# Altium PCB Place_3D_Body.PcbDoc
Units mil, origin at the board's own origin, x right, y up, seen from the top; angles counter-clockwise.
Board outline 1684 x 946 mil, 2 copper layers (Top Layer, Bottom Layer); 20 components, 10 nets, 51 pads, 29 vias.
Unrouted connection lines stored in the file: 1.
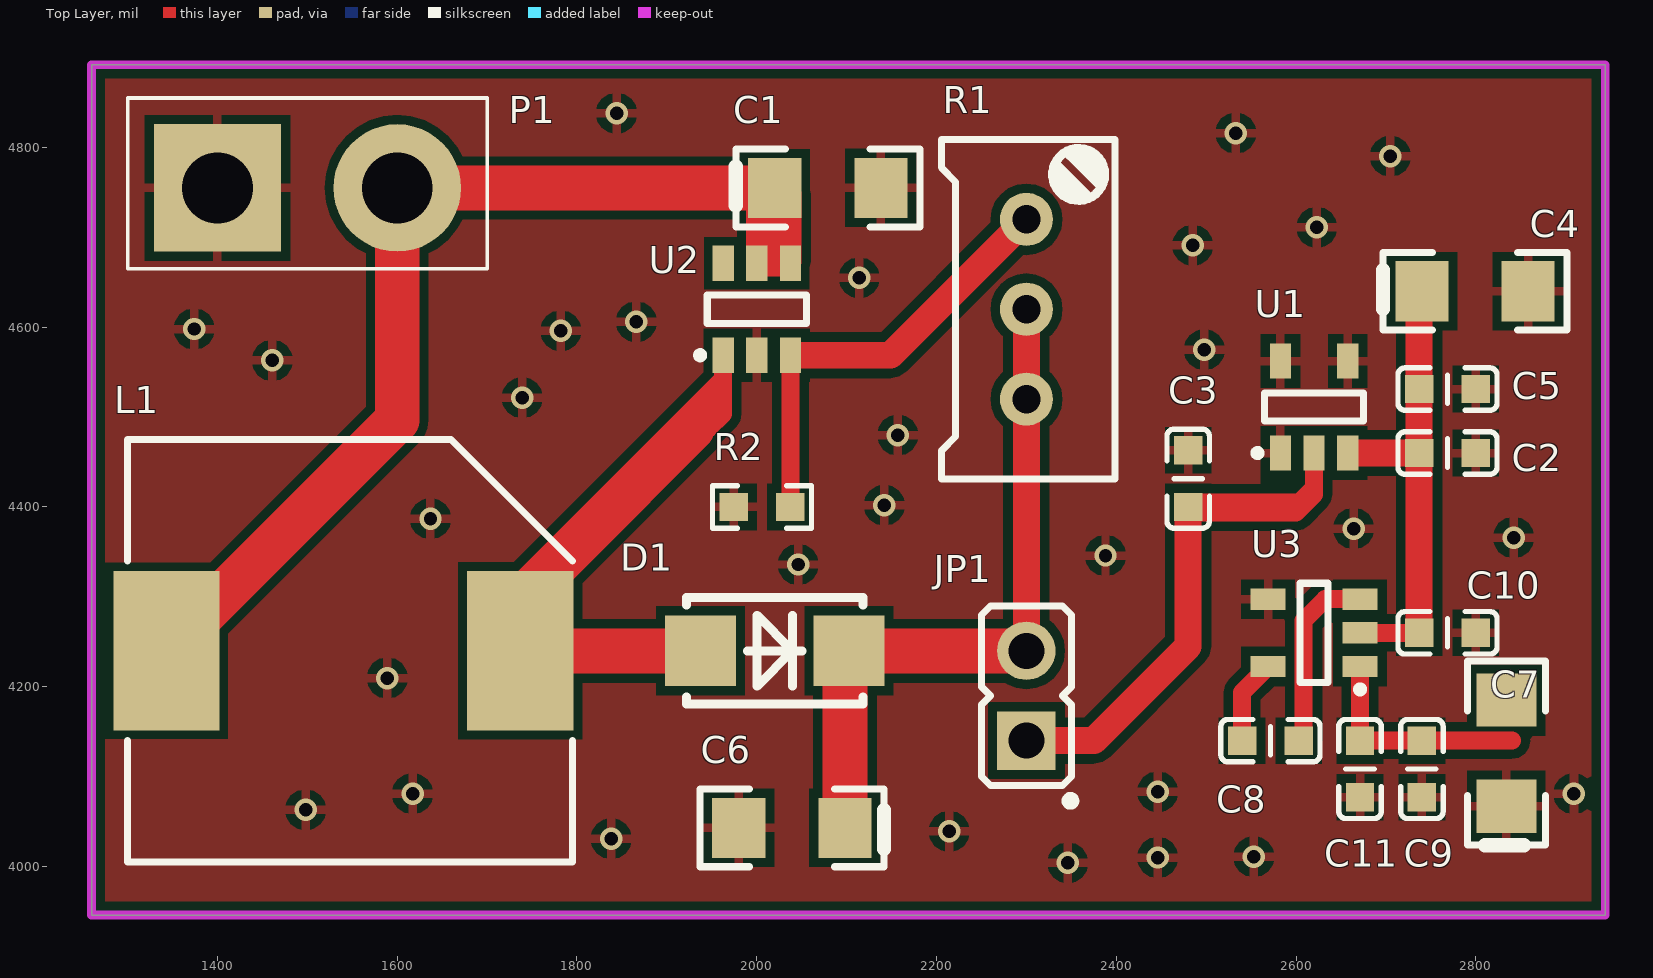
[diagram p0: Top Layer view]
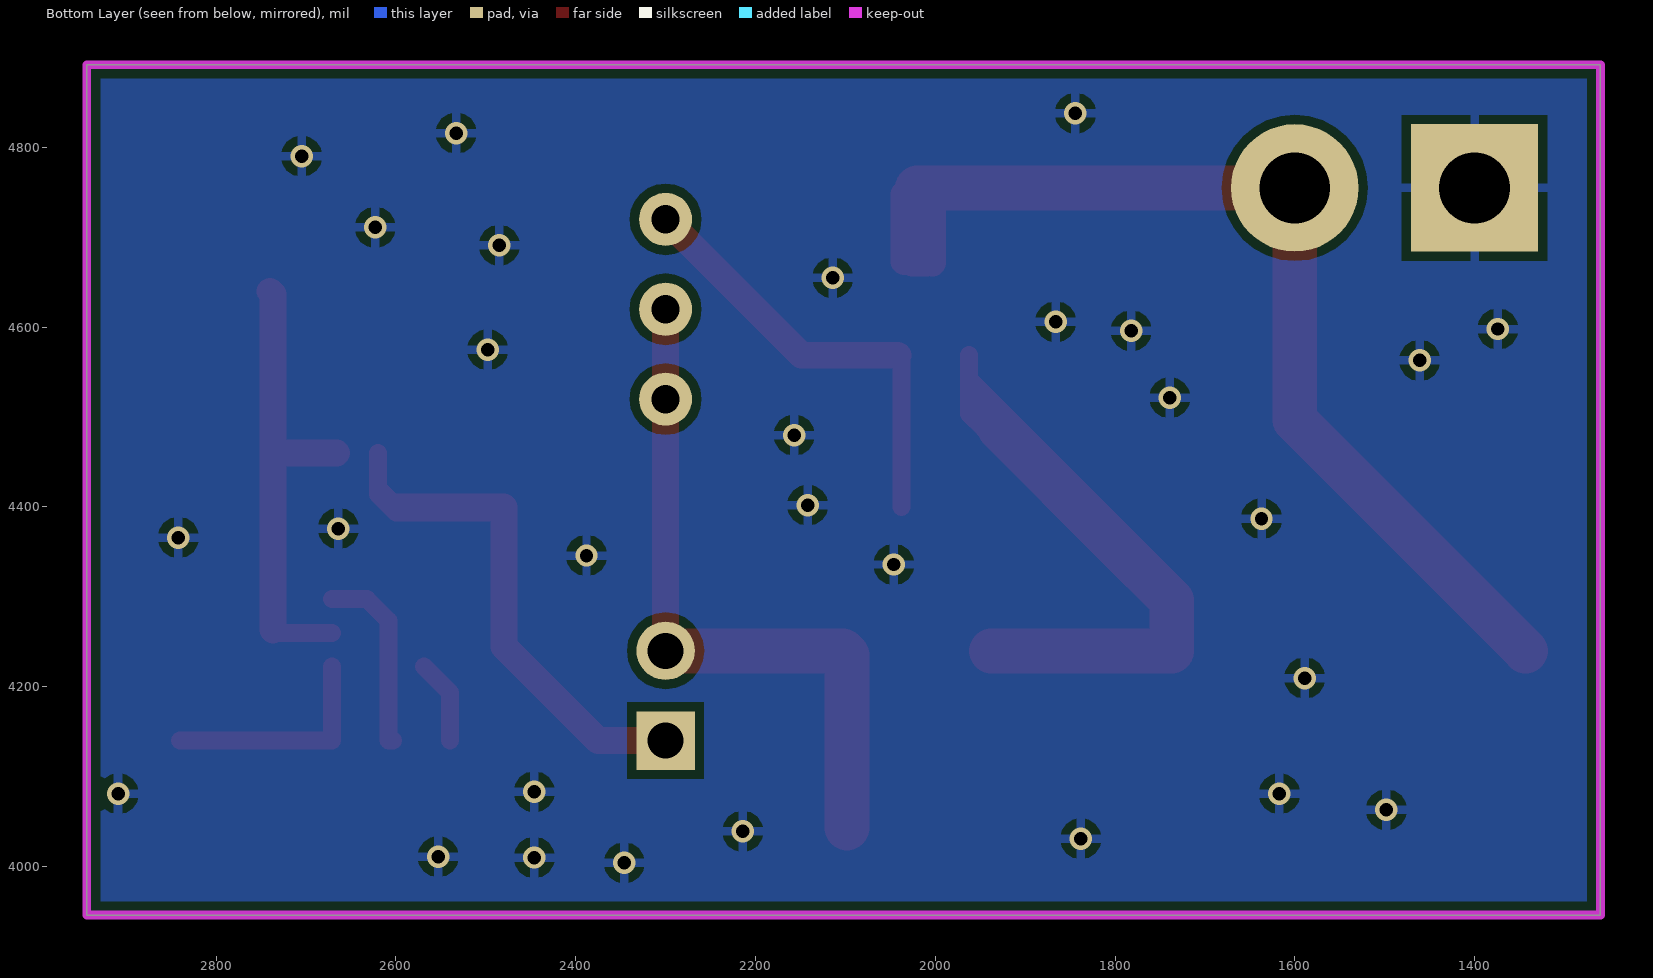
[diagram p1: Bottom Layer view, seen from below]
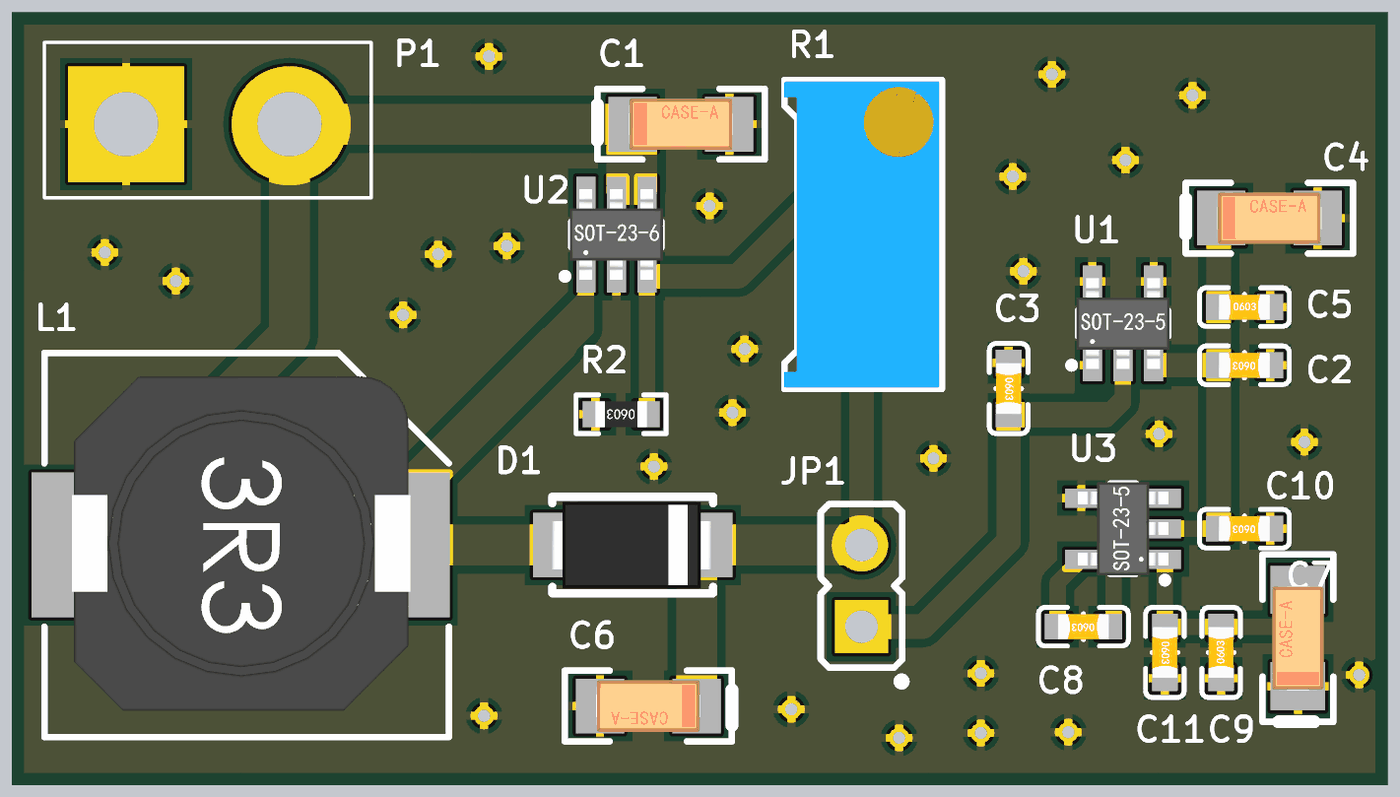
[diagram p2: 3D render of the assembled board from above, using the file's embedded part models]

## Layer stack, top to bottom
Top Solder: solder mask 0.4, Solder Resist, Dk 3.5
Top Layer: signal copper 1.4
Dielectric 1: dielectric 12.6, FR-4, Dk 4.8
Bottom Layer: signal copper 1.4
Bottom Solder: solder mask 0.4, Solder Resist, Dk 3.5

## Board outline
1260,3946 1260,4892 2944,4892 2944,3946

## Design rules (kind name [scope] priority, off if disabled: settings)
Clearance [All] p1: gap=10 ignorepadtopadclearanceinfootprint=FALSE except(0: Arc-Hole Track-Hole SMDPad-Hole THPad-Hole Via-Hole Fill-Hole Poly-Hole Region-Hole Text-Hole)
PolygonConnect [All] p1: connectstyle=Relief reliefconductorwidth=10 reliefentries=4 polygonreliefangle="90 Angle" airgapwidth=10
RoutingVias [All] p1: holewidth=28 width=50 viastyle="Through Hole" minholewidth=28 minwidth=50 maxholewidth=28 maxwidth=50
SolderMaskExpansion [All] p1: expansion=4
Width [All] p1: maxlimit=50 minlimit=10 preferedwidth=10
30 further rules are at their usual default settings.

## Components (designator, comment, footprint, x,y, rotation, side; value= is the part's Value field where it differs from the comment)
C1 "Cap Pol1" tan-a 2020,4755 r0 top value=10uF
C2 "Cap" C-0603 2800,4460 r180 top value=1uF
C3 "Cap" C-0603 2480,4462.99 r270 top value=0.1uF
C4 "Cap Pol1" tan-a 2740,4640 r0 top value=10uF
C5 "Cap" C-0603 2737.01,4531.18 r0 top value=0.1uF
C6 "Cap Pol1" tan-a 2098.11,4042.99 r180 top value=10uF
C7 "Cap" C-0603 2799.99,4260 r180 top value=10uF
C8 "Cap" C-0603 2602.99,4140 r180 top value=10uF
C9 "Cap" C-0603 2740,4077.01 r90 top value=10uF
C10 "Cap Pol1" TAN-A 2834,4067 r90 top value=10uF
C11 "Cap" C-0603 2671.18,4140 r270 top value=0.1uF
D1 "SS34" LC-SMA(DO-214AC)_S2 2020,4240 r180 top
JP1 "PBC02SAAN" Sullins_PBC02SAAN 2299.82,4140.12 r90 top
L1 "SMDRH105R-220MT" SMDRH105R 1540,4240 r180 top value=22uH
P1 "Header 2" POWER-p2 1500,4760 r180 top
R1 "RPot" rp-3296-w 2300,4620 r90 top value=100K
R2 "Res2" r-0603 2037.32,4400 r180 top value=2.2K
U1 "TLV70450" SOT-23-5 2620,4511.18 r0 top
U2 "SDB628" sot-23-6 2000,4620 r0 top
U3 "SGM3207" SOT-23-5 2620,4260 r90 top

## Footprints (in the part's own frame and the unit in brackets; to place one, negate y for a bottom-side part, rotate by r counter-clockwise, add the part's x,y. Pads: shape width x height; smd on the part's side, far side on the other; paste and mask are expansions set on the pad)
C-0603 [mm]
  rect 0.8x0.8 smd: 1(0,0) 2(1.6,0)
  silkscreen extent -0.6,-0.6 2.2,0.6, body extent 0,-0.4 1.6,0.4, height 0.8
LC-SMA(DO-214AC)_S2 [mm]
  rect 2x2 smd: 1(2.1,0) 2(-2.1,0)
  silkscreen extent -2.5,-1.5 2.5,1.5, body extent -2.46,-1.35 2.54,1.35, height 2.15
POWER-p2 [mm]
  round 3.6 hole 2: 1(-2.54,0.127)
  rect 3.6x3.6 hole 2: 2(2.54,0.127)
  silkscreen extent -5.08,-2.41 5.08,2.41
r-0603 [mm]
  rect 0.8x0.8 smd: 1(0,0) 2(1.6,0)
  silkscreen extent -0.6,-0.6 2.2,0.6, body extent 0,-0.4 1.6,0.4, height 0.45
rp-3296-w [mm]
  round 1.5 hole 0.8: 1(2.54,0) 2(0,0) 3(-2.54,0)
  silkscreen extent -4.8,-2.5 4.8,2.4, body extent -4.77,-2.42 4.76,2.41, height 11.57
SMDRH105R [mm]
  rect 3x4.5 smd: 1(-5,0) 2(5,0)
  silkscreen extent -6.48,-5.97 6.1,5.97, body extent -5.28,-5.25 5.24,5.15, height 5.16
SOT-23-5 [mm]
  rect 0.6x1 smd: 1(-0.95,-1.3) 2(0,-1.3) 3(0.95,-1.3) 4(0.95,1.3) 5(-0.95,1.3)
  silkscreen extent -1.7,-1.4 1.4,0.4, body extent -1.45,-1.41 1.45,1.41, height 1.15
sot-23-6 [mm]
  rect 0.6x1 smd: 1(-0.95,-1.3) 2(0,-1.3) 3(0.95,-1.3) 4(0.95,1.3) 5(0,1.3) 6(-0.95,1.3)
  silkscreen extent -1.7,-1.4 1.4,0.4, body extent -1.45,-1.41 1.45,1.41, height 1.15
Sullins_PBC02SAAN [mm]
  rect 1.65x1.65 hole 1.016: 1(-0.003,-0.004)
  round 1.65 hole 1.016: 2(2.537,-0.004)
  silkscreen extent -1.83,-1.37 3.81,1.27, body extent -1.27,-1.27 3.81,1.27, height 8.38
tan-a [mm]
  rect 1.5x1.7 smd: 1(0,0) 2(3,0)
  silkscreen extent -1.1,-1.1 4.1,1.1, body extent -0.12,-0.8 3.12,0.8, height 1.6
TAN-A [mm]
  rect 1.5x1.7 smd: 1(0,0) 2(3,0)
  silkscreen extent -1.1,-1.1 4.1,1.1, body extent -0.12,-0.8 3.12,0.8, height 1.6

## Part data
C1 C4 C6 C10: "Polarized Capacitor (Radial)", LatestRevisionDate=17-Jul-2002, LatestRevisionNote="Re-released for DXP Platform.", PackageDescription="Polarized Capacitor (Radial); 2 Leads", PackageReference=RB7.6-15, Published=8-Jun-2000, Publisher="Altium Limited"
C2 C3 C5 C7 C8 C9 C11: "Capacitor", LatestRevisionDate=17-Jul-2002, LatestRevisionNote="Re-released for DXP Platform.", PackageReference=RAD-0.3, Published=8-Jun-2000, Publisher="Altium Limited"
D1: library part Diode, "Default Diode", Code_JEDEC=DO-214-AB, LatestRevisionDate=17-Jul-2002, LatestRevisionNote="Re-released for DXP Platform.", PackageReference=SMC, PackageVersion=Sep-1996, Published=8-Jun-2000, Publisher="Altium Limited"
JP1: "Header, 100mil, 2x1, Gold, TH", Color=Black, Current_A=3, Manufacturer="Sullins Connector Solutions", Supplier Part Number 1=S1011E-02-ND, Voltage_V=1800, Cert_UL=Y, ClassName=Header, ComponentLink1Description="Datasheet URL", ComponentLink1URL=http://www.sullinscorp.com/catalogs/77_PAGE108-109_.100_MALE_HDR.pdf, CompType=Header, ContactFinish=Gold, Gender=Male, LatestRevisionDate=2016-03-04, MountType=TH, Orientation=Vertical, PackageReference="Sullins 100mil, 1x2, 230 mil above insulator", PartNumber=PBC02SAAN, PinCount=2, Pitch_mm=2.54, Publisher="Texas Instruments", RoHS=Y, Row_Count=1, Shrouded=N, Supplier 1=Digi-Key, SymbolCreator=a0412235, SymbolVersion=2013-10-31
L1: library part Inductor, "Inductor", Code_IEC=1005, Code_JEITA=0402, LatestRevisionDate=29-May-2009, LatestRevisionNote="IPC-7351 Footprint Added.", PackageDescription="Chip Inductor", PackageReference=0402-A, Published=8-Jun-2000, Publisher="Altium Limited"
P1: "Header, 2-Pin", LatestRevisionDate=17-Jul-2002, LatestRevisionNote="Re-released for DXP Platform.", Publisher="Altium Limited"
R1: "Potentiometer", LatestRevisionDate=17-Jul-2002, LatestRevisionNote="Re-released for DXP Platform.", PackageDescription="Variable Resistor, Thru-Hole; 3 Leads", PackageReference=VR5, Published=8-Jun-2000, Publisher="Altium Limited", Set Position=0.5, Sim Note="Enter the Resistance value and the set point into parameter fields."
R2: "Resistor", LatestRevisionDate=17-Jul-2002, LatestRevisionNote="Re-released for DXP Platform.", PackageReference=AXIAL-0.4, Published=8-Jun-2000, Publisher="Altium Limited"
U1: library part TLV704
U3: library part TPS6040x

## Via types
v1: diameter 25, hole 15, Top Layer to Bottom Layer, 29 vias

## Nets (pads, with @x,y where several pads share a name; then routed paths per layer and width w, separated by ;. In a path a pad name is that pad's centre, name@x,y a point inside that pad or via, vN(x,y) a via of type N, cw(c..) or ccw(c..) an arc to the next point about the centre after c; other vN are vias at no path point)
3V7: C1.1 L1.2 P1.1 U2.4 U2.5 | length 1312
  Top Layer w30: U2.5@2003,4671.18 C1.1@2003,4746 ; 2005,4700 C1.1@2005,4735 ; U2.5@2009,4671.18 U2.4@2026,4671.18 ; U2.5@2009,4683.18 U2.4@2026,4683.18 ; 2009,4694.18 2026,4694.18 ; 2020,4720 C1.1 ; U2.4@2035,4673.18 C1.1@2035,4748
  Top Layer w50: L1.2 1600,4496.85 P1.1 C1.1
5V: C2.2 C4.1 C5.1 C7.2 U1.3 U3.2 | length 518.1
  Top Layer w20: U3.2 C7.2@2740,4260
  Top Layer w30: U1.3@2666,4460 C2.2 ; C7.2@2737.01,4262.99 C2.2 ; C4.1 2737.01,4637.01 C5.1 C2.2
12V: C3.2 JP1.1 U1.2 | length 870.2
  Top Layer w20: U1.2 2620,4421 ; C3.2 2486,4394 2600,4394 2620,4414 2620,4415 ; C3.2 2485,4405 2604,4405 2620,4421 ; C3.2 2605,4400 2620,4415 ; 2620,4415 2620,4421
  Top Layer w30: JP1.1 2375,4140 2480,4245 C3.2
-5V: C9.2 C10.2 C11.1 U3.1 | length 251.4
  Top Layer w20: U3.1 C11.1 C9.2 2840,4140
GND: C1.2 C2.1 C3.1 C4.2 C5.2 C6.2 C7.1 C9.1 C10.1 C11.2 P1.2 R2.2 U1.1 U1.4 U1.5 U2.2 U3.4
  other v1: 2346,4004 2446,4010 2553,4011 1838,4031 2214,4039 1498,4063 1617,4081 2909,4081 2446,4083 1589,4209.7 2046,4336 2388,4346 2842,4366 2664,4376 1637,4387 2142,4402 2157,4480 1739,4521.6 1461,4563 2498.02,4575 1782,4596 1374,4598 1866,4606 2114,4655 2485,4691 2623,4711 2705,4790.3 2533,4816 1844,4838
NetC6_1: C6.1 D1.2 JP1.2 R1.2 R1.3 | length 776.2
  Top Layer w30: JP1.2 R1.3 R1.2
  Top Layer w50: C6.1 2098.11,4235.43 D1.2 JP1.2
NetC8_1: C8.1 U3.3 | length 211.6
  Top Layer w20: C8.1 2608.5,4140 2608.5,4273.5 2632.4,4297.4 U3.3
NetC8_2: C8.2 U3.5 | length 94.5
  Top Layer w20: C8.2 2540,4193.78 U3.5
NetD1_1: D1.1 L1.1 U2.1 | length 992.8
  Top Layer w20: 1800.5,4359.5 1800.5,4380.5 1962.6,4542.6 ; 1920,4496 1962.6,4538.6 ; U2.1 1962.6,4542.6 ; 1962.6,4521.6 1962.6,4538.6 ; 1962.6,4521.6 1962.6,4503.6 1946,4487 1928,4487 1962.6,4521.6 ; 1962.6,4538.6 1962.6,4542.6
  Top Layer w50: 1928,4487 1800.5,4359.5 1736.85,4295.85 L1.1 D1.1
NetR1_1: R1.1 R2.1 U2.3 | length 490.1
  Top Layer w20: R2.1 2037.4,4400.08 U2.3
  Top Layer w30: U2.3@2041.4,4568.82 2148.82,4568.82 R1.1
pads on no net: U2.6

## Polygon pours and split planes (outlines as drawn)
GND on Top Layer (solid, pour order 22): 1260,4892 2944,4892 2944,3946 1260,3946
GND on Bottom Layer (solid, pour order 24): 1260,4892 2944,4892 2944,3946 1260,3946

## Keep-outs
Keep-Out Layer:
  the board outline again, w10